# Altium PCB LightSensor.PcbDoc
Units mm, origin at the board's own origin, x right, y up, seen from the top; angles counter-clockwise.
Board outline 10 x 10 mm, 2 copper layers (Top Layer, Bottom Layer); 3 components, 4 nets, 12 pads, 4 vias.
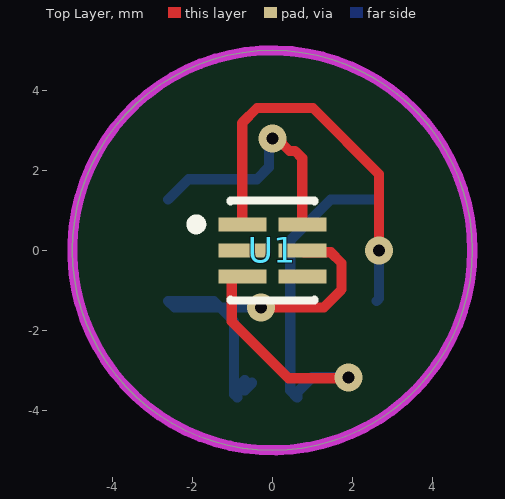
[diagram p0: Top Layer view]
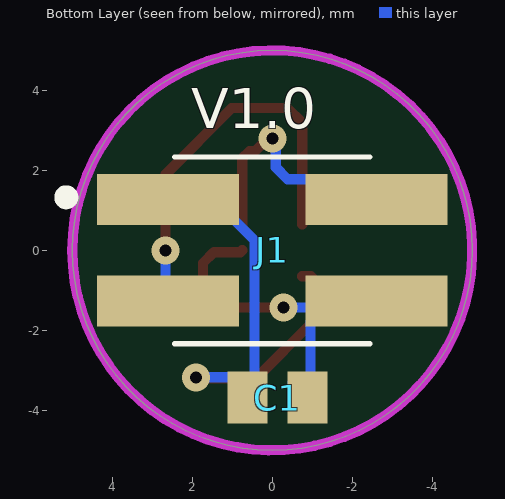
[diagram p1: Bottom Layer view, seen from below]

## Layer stack, top to bottom
Top Solder: solder mask 0.0102, Solder Resist, Dk 3.5
Top Layer: signal copper 0.0356
Dielectric 1: dielectric 0.32, FR-4, Dk 4.8
Bottom Layer: signal copper 0.0356
Bottom Solder: solder mask 0.0102, Solder Resist, Dk 3.5

## Board outline
-5,0 ccw(c0,0) 0,-5 ccw(c0,0) 5,0 ccw(c0,0) 0,5 ccw(c0,0)

## Design rules (kind name [scope] priority, off if disabled: settings)
Clearance [All] p1: gap=0.254 ignorepadtopadclearanceinfootprint=FALSE except(0: Arc-Hole Track-Hole SMDPad-Hole THPad-Hole Via-Hole Fill-Hole Poly-Hole Region-Hole Text-Hole)
PolygonConnect [All] p1: connectstyle=Relief reliefconductorwidth=0.254 reliefentries=4 polygonreliefangle="90 Angle" airgapwidth=0.254
RoutingVias [All] p1: holewidth=0.3 width=0.7 viastyle="Through Hole" minholewidth=0.3 minwidth=0.7 maxholewidth=0.711 maxwidth=1.27
SolderMaskExpansion [All] p1: expansion=0.102 istentingtop=FALSE
Width [All] p1: maxlimit=0.254 minlimit=0.254 preferedwidth=0.254
30 further rules are at their usual default settings.

## Components (designator, comment, footprint, x,y, rotation, side; value= is the part's Value field where it differs from the comment)
C1 "1uF" CAPC2013X135X45LL10T25 -0.127,-3.683 r0 bottom
J1 "5-146130-1" TE_5-146130-1 0,0 r180 bottom
U1 "TSL25911FN" AMS-FN-6-2400X2000DE_V 0,0 r0 top

## Footprints (in the part's own frame and the unit in brackets; to place one, negate y for a bottom-side part, rotate by r counter-clockwise, add the part's x,y. Pads: shape width x height; smd on the part's side, far side on the other; paste and mask are expansions set on the pad)
AMS-FN-6-2400X2000DE_V [mm] "SON, 6-Leads, Body 2.4x2mm, Pitch 0.65mm"
  rect 1.2x0.35 smd mask+0.102: 1(-0.75,0.65) 2(-0.75,0) 3(-0.75,-0.65) 4(0.75,-0.65) 5(0.75,0) 6(0.75,0.65)
  silkscreen extent -2.02,-1.25 1.05,1.25, body extent -1,-1.2 1,1.2, height 0.7
CAPC2013X135X45LL10T25 [mm] "Chip Capacitor, 2-Leads, Body 2.00x1.25mm, IPC High Density"
  rect 1x1.3 smd: 1(-0.75,0) 2(0.75,0)
  body extent -1.05,-0.67 1.05,0.68, height 1.35
TE_5-146130-1 [mm]
  rect 3.555x1.27 smd: 1(-2.605,1.27) 2(2.605,1.27) 3(-2.605,-1.27) 4(2.605,-1.27)
  silkscreen extent -5.3,-2.33 2.44,2.33, body extent -3.91,-2.34 4.01,2.34, height 9.84

## Part data
C1: library part CMP-1036-04761-2, Manufacturer=Murata, Part Number=GRM21BR71H105KA12L
J1: "AMPMODU 4 Position Surface Mount Dual Row Straight 2.54 mm Breakaway Header", Package=None, Availability=Unavailable, MF="{'manufacturer': u'TE Connectivity'}", MP=5-146130-1, Price=None
U1: library part CMP-0865-00001-1, "Light-to-Digital Converter with I2C Interface, 2.7 to 3.6 V, -30 to 70 degC, FN-6, Pb-Free, Reel", Manufacturer=AMS, Supply Voltage (V)="2.7 - 3.6", ComponentLink1Description="Manufacturer URL", ComponentLink1URL=www.ams.com, ComponentLink2Description=Datasheet, ComponentLink2URL=http://www.ams.com/eng/content/download/389383/1251117/221235, Interface="I2C - Vdd", Maximum Lux=88K, Mounting Technology="Surface Mount", PackageDescription="6-Pin Dual Flat No-Lead, 2.4 x 2 mm Body, 0.65 mm Pitch", PackageReference=FN-6, PackageVersion="TAOS059Q, 11/2009", PartNumber=TSL25911FN, Programmable="Gain, Integration Time, Interrupt"

## Via types
v1: diameter 0.7, hole 0.3, Top Layer to Bottom Layer, 4 vias

## Nets (pads, with @x,y where several pads share a name; then routed paths per layer and width w, separated by ;. In a path a pad name is that pad's centre, name@x,y a point inside that pad or via, vN(x,y) a via of type N, cw(c..) or ccw(c..) an arc to the next point about the centre after c; other vN are vias at no path point)
GND_PCB_LS: C1.2 J1.1 U1.3 | length 13
  Top Layer w0.254: U1.3 -0.968,-0.65 -1.016,-0.698 -1.016,-1.778 0.403,-3.197 1.883,-3.197 v1(1.905,-3.175)
  Bottom Layer w0.254: v1(1.905,-3.175) 0.996,-3.175 0.623,-3.548 C1.2 0.447,-3.507 0.447,0.254 1.463,1.27 J1.1
SCL_PCB: J1.3 U1.1 | length 10
  Top Layer w0.254: U1.1 -0.75,3.187 -0.381,3.556 1.016,3.556 2.667,1.905 v1(2.667,0)
  Bottom Layer w0.254: J1.3 2.667,-1.208 v1(2.667,0)
SDA_PCB: J1.2 U1.6 | length 6.2
  Top Layer w0.254: v1(0,2.794) 0.121,2.794 0.431,2.484 0.57,2.484 0.75,2.304 U1.6
  Bottom Layer w0.254: J1.2 -2.097,1.778 -0.381,1.778 -0.085,2.074 -0.085,2.709 v1(0,2.794)
VCC_3V3_PCB_LS: C1.1 J1.4 U1.5 | length 10.8
  Top Layer w0.254: v1(-0.285,-1.429) 1.285,-1.429 1.731,-0.983 1.731,-0.317 1.462,-0.048 0.798,-0.048 U1.5
  Bottom Layer w0.254: C1.1@-0.955,-3.605 -0.955,-1.778 J1.4@-1.304,-1.429 ; C1.1 -0.877,-3.431 C1.1@-0.691,-3.244 ; C1.1@-0.691,-3.497 C1.1@-0.504,-3.31 ; v1(-0.285,-1.429) J1.4@-1.304,-1.429 ; J1.4@-1.304,-1.429 -1.463,-1.27 J1.4 -2.446,-1.429 J1.4@-1.304,-1.429
pads on no net: U1.2 U1.4

## Keep-outs
Keep-Out Layer:
  circle w0.254: c0,0 r5

## Silkscreen, mask and mechanical layers (free items; w line width, h text height)
Bottom Overlay:
  text "V1.0" at 2.032,3.048 h1